# EAGLE board groupe06 (EAGLE 8.6.3)
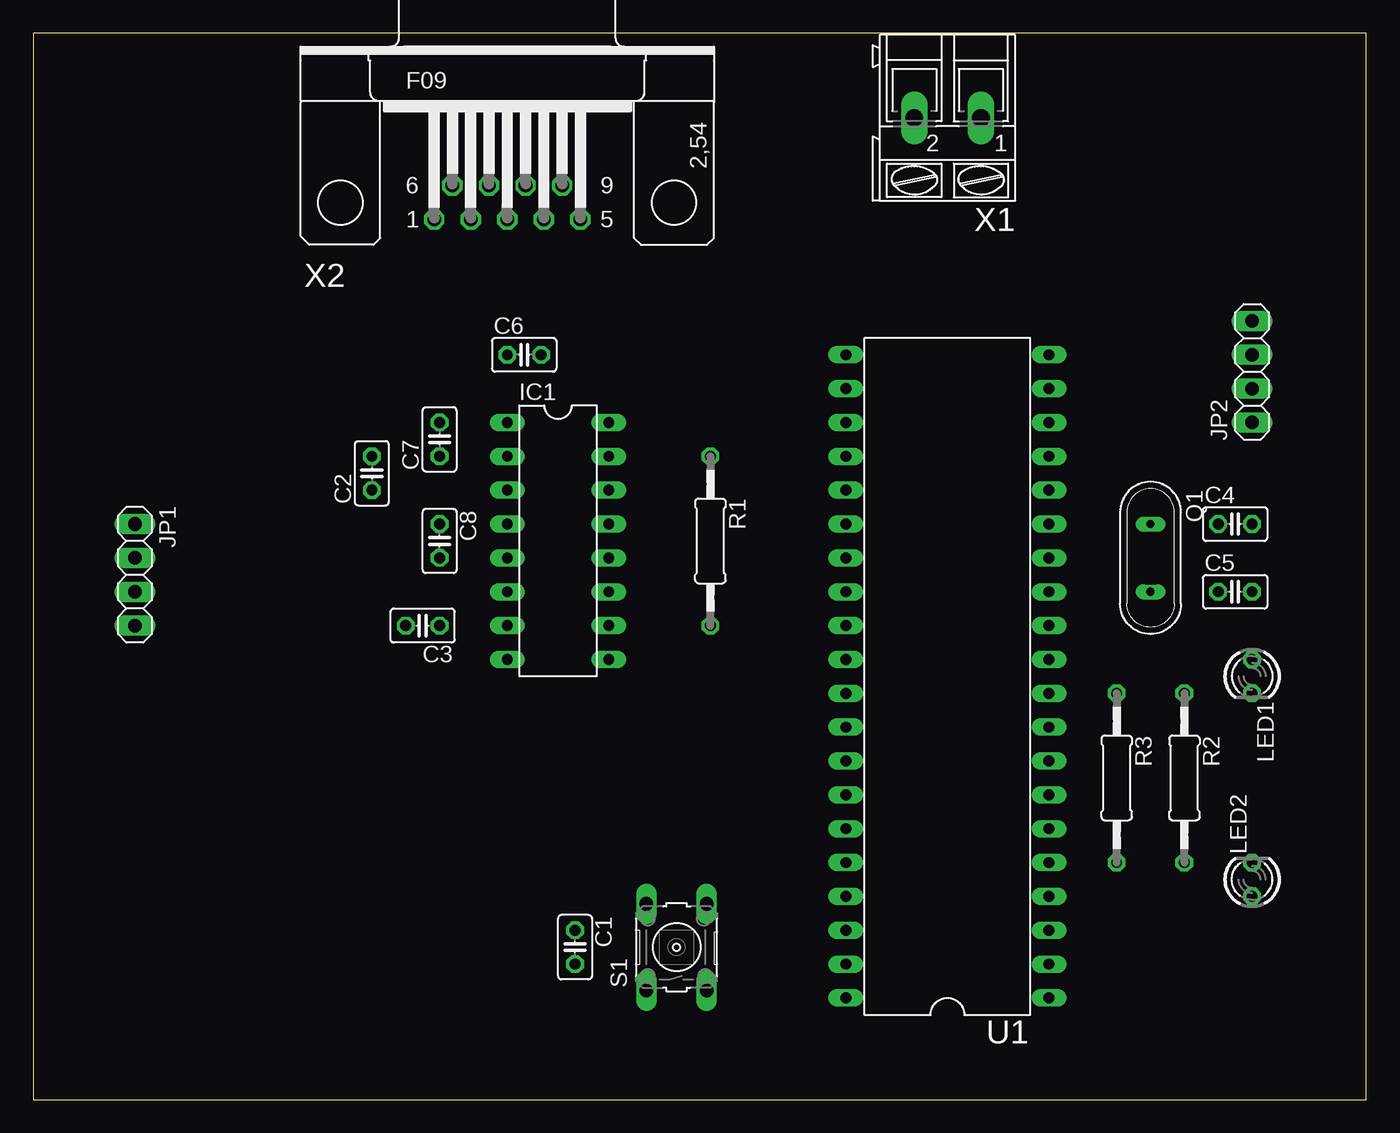
[diagram p0: board, top side]
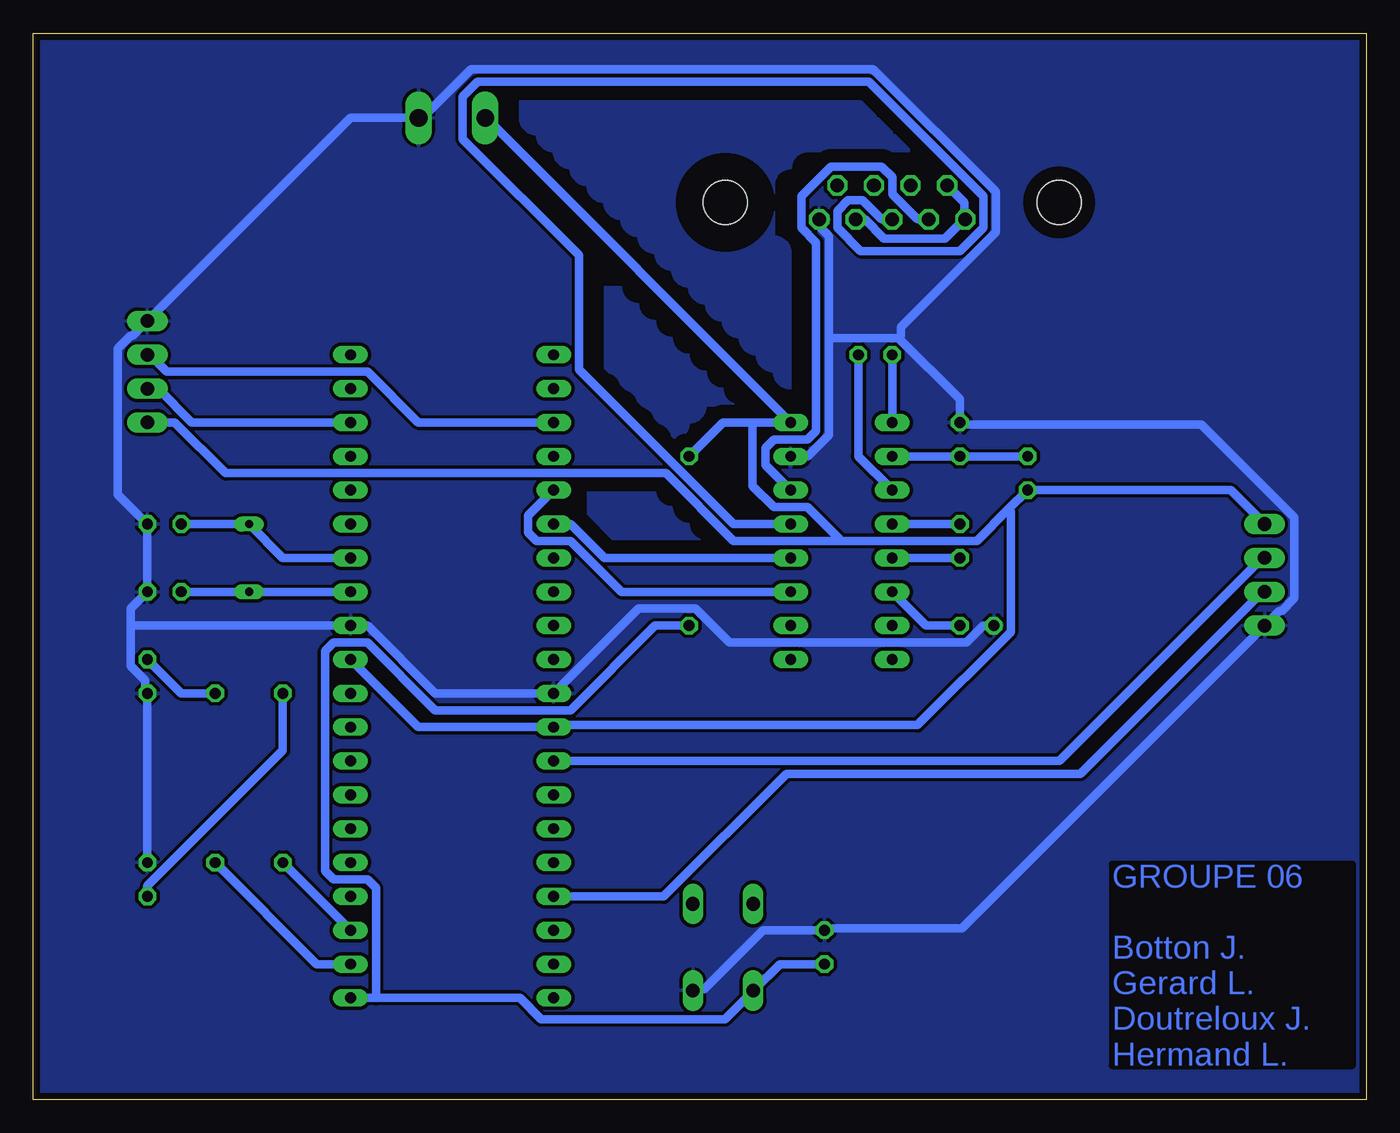
[diagram p1: board, bottom side, seen from below]

Size 100 x 80 mm. Coordinates in mm from the lower left corner, seen from the top.
Outline: 0,0 100,0 100,80 0,80 0,0
Copper layers (1*16): Top 0.035mm / dielectric 1.5mm / Bottom 0.035mm
Design rules "default *": minimum track width 25mil, minimum drill 0.35mm, track to track 10mil, track to pad 10mil, pad to pad 10mil, via to via 10mil, smd to smd 10mil, copper to edge 20mil, drill to drill 6mil, minimum pad ring 10mil, minimum via ring 8mil, stop-mask expansion 4mil, vias tented up to drill 0mil, thermal gap 10mil

## Footprints (pad centres in the part's own frame; a part is rotated, then mirrored left to right if it is on the bottom)
C025-025X050 = drill 0.813 octagon: 1 -1.27,0; 2 1.27,0
DIL16 = drill 0.813 long: 1 -8.89,-3.81; 2 -6.35,-3.81; 3 -3.81,-3.81; 4 -1.27,-3.81; 5 1.27,-3.81; 6 3.81,-3.81; 7 6.35,-3.81; 8 8.89,-3.81; 9 8.89,3.81; 10 6.35,3.81; 11 3.81,3.81; 12 1.27,3.81; 13 -1.27,3.81; 14 -3.81,3.81; 15 -6.35,3.81; 16 -8.89,3.81
1X04 = drill 1.016 long: 1 -3.81,0; 2 -1.27,0; 3 1.27,0; 4 3.81,0
LED3MM = drill 0.813 octagon: A -1.27,0; K 1.27,0
QS = drill 0.61 long: 1 -2.54,0; 2 2.54,0
0207/12 = drill 0.813 octagon: 1 -6.35,0; 2 6.35,0
B3F-10XX = drill 1.016 long: 1 -3.251,2.261; 2 3.251,2.261; 3 -3.251,-2.261; 4 3.251,-2.261
DIL40 = drill 0.813 long: 1 -24.13,-7.62; 2 -21.59,-7.62; 3 -19.05,-7.62; 4 -16.51,-7.62; 5 -13.97,-7.62; 6 -11.43,-7.62; 7 -8.89,-7.62; 8 -6.35,-7.62; 9 -3.81,-7.62; 10 -1.27,-7.62; 11 1.27,-7.62; 12 3.81,-7.62; 13 6.35,-7.62; 14 8.89,-7.62; 15 11.43,-7.62; 16 13.97,-7.62; 17 16.51,-7.62; 18 19.05,-7.62; 19 21.59,-7.62; 20 24.13,-7.62; 21 24.13,7.62; 22 21.59,7.62; 23 19.05,7.62; 24 16.51,7.62; 25 13.97,7.62; 26 11.43,7.62; 27 8.89,7.62; 28 6.35,7.62; 29 3.81,7.62; 30 1.27,7.62; 31 -1.27,7.62; 32 -3.81,7.62; 33 -6.35,7.62; 34 -8.89,7.62; 35 -11.43,7.62; 36 -13.97,7.62; 37 -16.51,7.62; 38 -19.05,7.62; 39 -21.59,7.62; 40 -24.13,7.62
AK300/2 = drill 1.321 long: 1 -2.515,0; 2 2.489,0
F09H = drill 1.016 octagon: 1 -5.486,-1.27; 2 -2.743,-1.27; 3 0,-1.27; 4 2.743,-1.27; 5 5.486,-1.27; 6 -4.115,1.27; 7 -1.372,1.27; 8 1.372,1.27; 9 4.115,1.27 | hole 3.302: -12.522,0; 12.522,0

## Placement (x,y rotation side)
C1  100n  [C025-025X050]  40.64,11.43 270 top
C2  1u  [C025-025X050]  25.4,46.99 90 top
C3  1u  [C025-025X050]  29.21,35.56 180 top
C4  18p  [C025-025X050]  90.17,43.18 0 top
C5  18p  [C025-025X050]  90.17,38.1 0 top
C6  1u  [C025-025X050]  36.83,55.88 0 top
C7  1u  [C025-025X050]  30.48,49.53 90 top
C8  1u  [C025-025X050]  30.48,41.91 270 top
IC1  MAX232  [DIL16]  39.37,41.91 270 top
JP1  HC-SR04  [1X04]  7.62,39.37 270 top
JP2  LCD-I2C  [1X04]  91.44,54.61 90 top
LED1  Green  [LED3MM]  91.44,31.75 270 top
LED2  Red  [LED3MM]  91.44,16.51 90 top
Q1  20MHz  [QS]  83.82,40.64 270 top
R1  10K  [0207/12]  50.8,41.91 270 top
R2  330  [0207/12]  86.36,24.13 270 top
R3  330  [0207/12]  81.28,24.13 270 top
S1  Reset  [B3F-10XX]  48.26,11.43 90 top
U1  PIC16F877P  [DIL40]  68.58,31.75 90 top
X1  +5V  [AK300/2]  68.58,73.66 180 top
X2  DB-9  [F09H]  35.56,67.31 0 top

## Library data of the parts
C1-C8 = rcl; SPICEPREFIX: C
IC1 = maxim; MF: MAXIM; MPN: MAX232ACPE+; OC_FARNELL: 9723773; OC_NEWARK: 68K4544
JP1 JP2 = pinhead
LED1 LED2 = led
Q1 = special
R1-R3 = rcl; SPICEPREFIX: R
S1 = switch-omron; MPN: B3F-1000; OC_FARNELL: 176432; OC_NEWARK: 36M3542
U1 = pic16f87x
X1 = con-ptr500; OC_FARNELL: unknown; OC_NEWARK: unknown
X2 = con-subd; OC_FARNELL: unknown; OC_NEWARK: unknown

## Nets
GND: C1.1 C3.2 C4.2 C5.2 C7.2 IC1.15 JP1.4 JP2.4 LED1.K LED2.K S1.3 U1.12 U1.31 X1.1 X2.5
N$1: IC1.11 U1.25
N$3: R2.2 U1.2
N$4: R3.2 U1.3
N$5: LED1.A R2.1
N$6: LED2.A R3.1
N$7: C1.2 R1.2 S1.1 U1.1
N$8: IC1.14 X2.2
N$9: IC1.13 X2.3
N$10: C5.1 Q1.2 U1.13
N$11: C4.1 Q1.1 U1.14
N$13: IC1.12 U1.26
N$14: X2.1 X2.4 X2.6
N$15: C3.1 IC1.6
N$16: JP2.3 U1.23
N$17: JP2.2 U1.18
N$19: JP1.2 U1.33
N$20: JP1.3 U1.37
N$21: C8.2 IC1.5
N$22: C6.2 IC1.3
N$23: C8.1 IC1.4
N$24: C6.1 IC1.1
N$26: C2.2 C7.1 IC1.2
VCC: C2.1 IC1.16 JP1.1 JP2.1 R1.1 U1.11 U1.32 X1.2

## Tracks (layer width: path | path; a pad name or v marks a point on that pad's centre or on a via)
GND
  Bottom 0.635: S1.3 50.48,8.26 49.69,8.26 45.24,12.7 C1.1 40.48,12.86 30.32,12.86 JP1.4 6.51,36.67 6.35,36.67 5.4,37.62 5.4,43.66 12.38,50.64 30.32,50.64 C7.2 30.48,52.55 35.08,57.15 | IC1.15 41.91,48.26 40.32,49.85 40.32,57.15 | 40.32,57.15 40.32,64.77 40.96,65.41 40.96,66.04 X2.5 | 40.32,57.15 35.08,57.15 | C3.2 28.73,35.56 30,34.29 47.78,34.29 50.32,36.83 54.61,36.83 U1.31 69.85,30.48 74.93,35.56 U1.12 92.71,35.56 | LED2.K LED1.K 91.6,30.64 91.6,31.43 92.71,32.54 92.71,35.56 | 92.71,35.56 92.71,36.83 C5.2 C4.2 93.66,45.4 93.66,56.36 92.71,57.31 92.55,57.31 JP2.4 76.2,73.66 X1.1 70.8,73.66 67.15,77.31 36.99,77.31 27.78,68.1 27.78,65.09 34.92,57.94 34.92,57.31 35.08,57.15
  pour Bottom: 0,80.01 100.33,80.01 100.33,0 0,0
  pour Bottom (isolate 1.016): 43.18,53.34 arc90 44.45,54.61 arc90 45.72,55.88 arc90 46.99,57.15 arc90 48.26,58.42 arc90 49.53,59.69 arc90 50.8,60.96 arc90 52.07,62.23 arc90 53.34,63.5 arc90 54.61,64.77 arc90 55.88,66.04 arc90 57.15,67.31 arc90 58.42,68.58 arc90 59.69,69.85 arc90 60.96,71.12 arc90 62.23,72.39 arc90 63.5,73.66 63.5,74.93 38.1,74.93 arc90 36.83,73.66 arc90 35.56,72.39 arc90 34.29,71.12 35.56,71.12 41.91,71.12 arc-90 43.18,69.85 arc-90 44.45,68.58 44.45,64.77 arc90 43.18,63.5
  pour Bottom (isolate 1.016): 48.26,53.34 arc90 49.53,54.61 arc90 50.8,55.88 arc90 52.07,57.15 arc90 53.34,58.42 arc90 54.61,59.69 arc90 55.88,60.96 57.15,60.96 57.15,59.69 57.15,54.61 arc90 55.88,53.34 arc90 54.61,52.07 arc90 53.34,50.8 arc90 52.07,49.53 arc-90 50.8,50.8 arc-90 49.53,52.07 48.26,52.07 46.99,52.07 arc90
  pour Bottom (isolate 1.016): 49.53,41.91 arc90 50.8,43.18 arc90 52.07,44.45 arc90 53.34,45.72 58.42,45.72 58.42,44.45 58.42,43.18 arc90 57.15,41.91
N$1
  Bottom 0.635: IC1.11 55.88,38.1 59.69,41.91 62.23,41.91 62.87,42.55 62.87,43.81 U1.25
N$3
  Bottom 0.635: U1.2 78.74,10.16 R2.2
N$4
  Bottom 0.635: R3.2 U1.3
N$5
  Bottom 0.635: R2.1 88.9,30.48 LED1.A
N$6
  Bottom 0.635: LED2.A 91.44,16.03 81.28,26.19 R3.1
N$7
  Bottom 0.635: C1.2 43.97,10.16 45.88,8.26 S1.1 46.2,7.94 48.1,6.03 61.91,6.03 63.5,7.62 74.3,7.62 | 74.3,7.62 U1.1 | R1.2 53.34,35.56 59.69,29.21 69.85,29.21 74.93,34.29 77.47,34.29 78.11,33.66 78.11,17.14 77.47,16.51 74.93,16.51 74.3,15.88 74.3,7.62
N$8
  Bottom 0.635: IC1.14 45.09,47.62 45.09,48.9 44.45,49.53 41.91,49.53 41.27,50.16 41.27,64.29 42.39,65.41 42.39,67.79 40.16,70.01 36.35,70.01 35.56,69.22 35.56,67.94 33.66,66.04 X2.2
N$9
  Bottom 0.635: IC1.13 47.47,43.18 59.05,54.77 59.05,63.34 67.79,72.07 67.79,75.25 66.67,76.36 37.31,76.36 28.73,67.79 28.73,65.41 30.48,63.66 37.94,63.66 39.69,65.41 39.69,66.67 38.89,67.47 37.78,67.47 36.35,66.04 X2.3
N$10
  Bottom 0.635: C5.1 Q1.2 U1.13
N$11
  Bottom 0.635: C4.1 Q1.1 81.28,40.64 U1.14
N$13
  Bottom 0.635: IC1.12 57.15,40.64 59.69,43.18 U1.26
N$14
  Bottom 0.635: X2.6 31.43,68.58 30.16,67.31 30.16,66.04 X2.1 30.32,65.88 31.59,64.61 36.2,64.61 37.62,66.04 X2.4
N$15
  Bottom 0.635: C3.1 33.02,35.56 IC1.6
N$16
  Bottom 0.635: U1.23 71.12,50.8 74.93,54.61 90.01,54.61 91.28,55.88 JP2.3
N$17
  Bottom 0.635: U1.18 88.11,50.8 90.65,53.34 JP2.2
N$19
  Bottom 0.635: U1.33 23.02,25.4 7.78,40.64 JP1.2
N$20
  Bottom 0.635: U1.37 52.7,15.24 43.5,24.45 21.43,24.45 7.78,38.1 JP1.3
N$21
  Bottom 0.635: IC1.5 C8.2
N$22
  Bottom 0.635: IC1.3 38.1,48.26 C6.2
N$23
  Bottom 0.635: IC1.4 C8.1
N$24
  Bottom 0.635: C6.1 IC1.1
N$26
  Bottom 0.635: C2.2 C7.1 IC1.2
VCC
  Bottom 0.635: 46.04,50.8 48.26,50.8 R1.1 | 46.04,50.8 IC1.16 66.04,73.66 X1.2 | U1.11 71.12,27.94 U1.32 60.8,28.1 33.66,28.1 26.67,35.08 26.67,44.13 26.83,44.29 | JP1.1 10.16,45.72 C2.1 26.83,44.29 | JP2.1 89.38,50.8 85.57,46.99 52.55,46.99 47.47,41.91 39.53,41.91 | 39.53,41.91 29.21,41.91 26.83,44.29 | 46.04,50.8 46.04,46.04 44.45,44.45 41.91,44.45 39.53,42.07 39.53,41.91

## Text on the board
Bottom: GROUPE 06 / / Botton J. / Gerard L. / Doutreloux J. / Hermand L.